# Altium PCB platforma.PcbDoc
Units mm, origin at the board's own origin, x right, y up, seen from the top; angles counter-clockwise.
Board outline 159.92 x 140 mm, 2 copper layers (Top Layer, Bottom Layer); 132 components, 295 nets, 836 pads, 33 vias.
Unrouted connection lines stored in the file: 480.
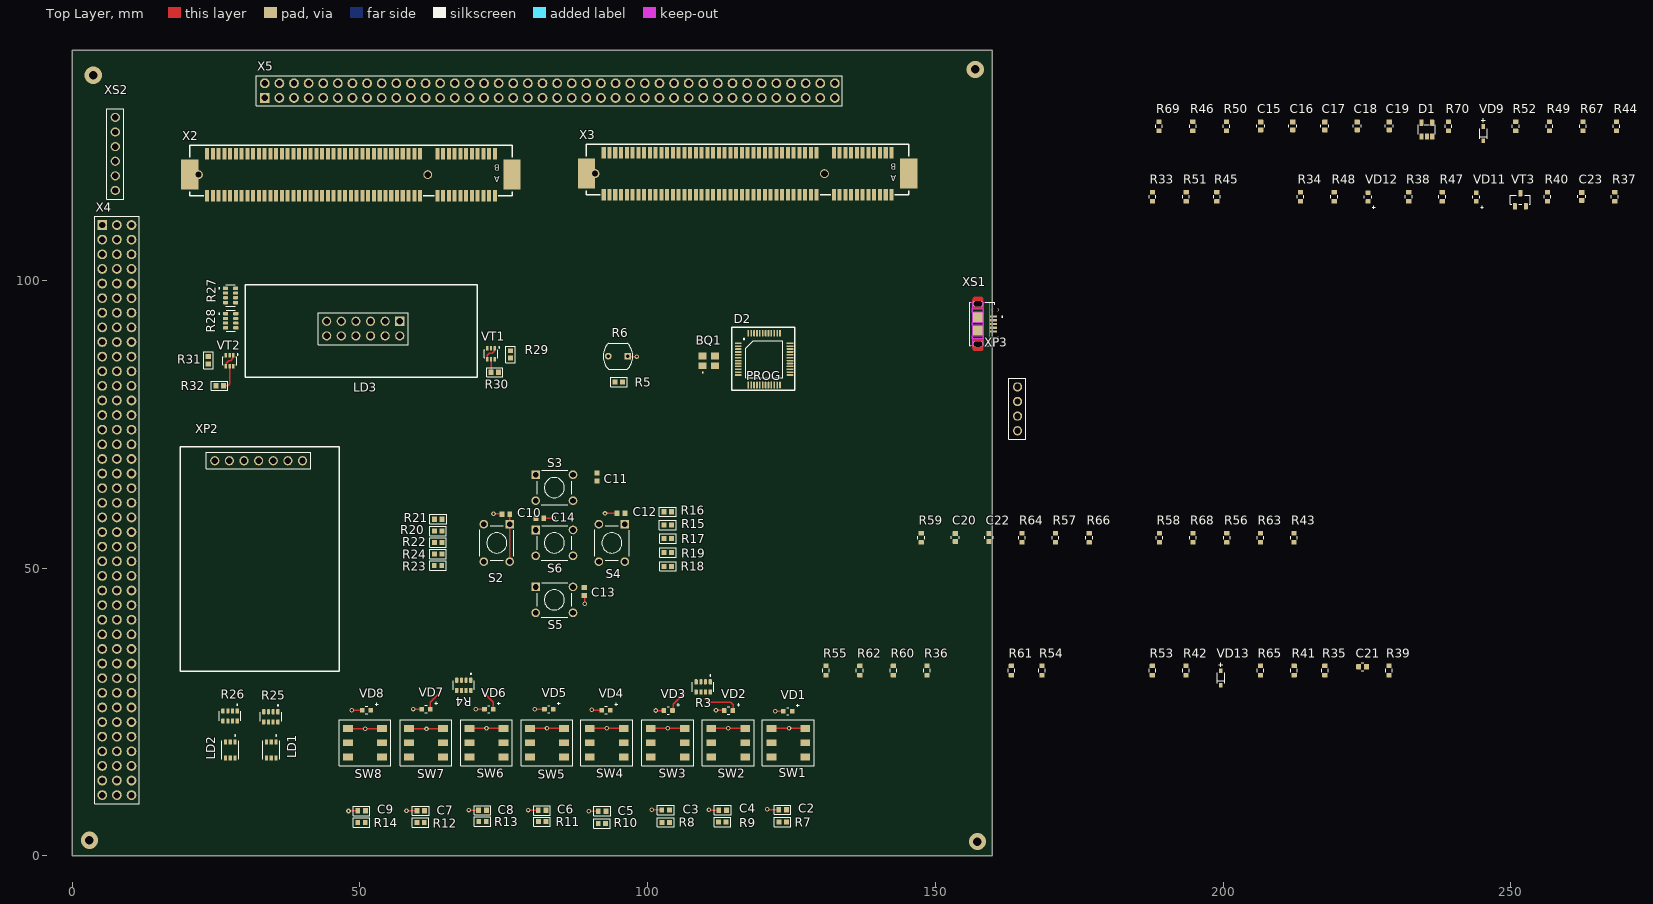
[diagram p0: Top Layer view]
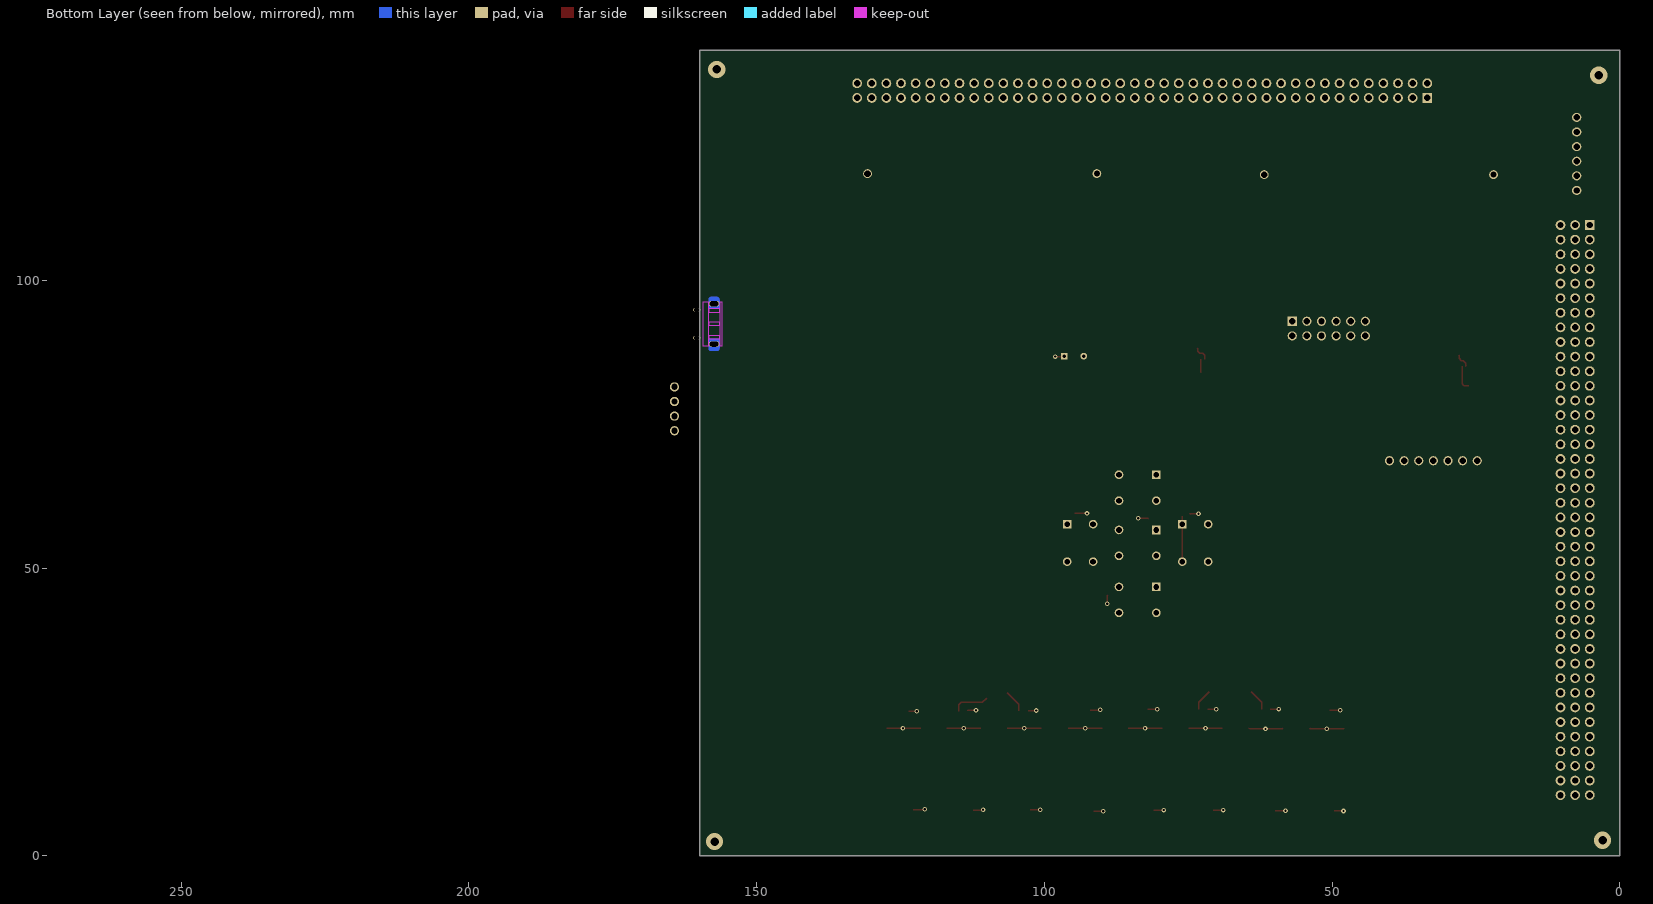
[diagram p1: Bottom Layer view, seen from below]

## Layer stack, top to bottom
Top Solder: solder mask 0.0102, Solder Resist, Dk 3.5
Top Layer: signal copper 0.0356
Dielectric 1: dielectric 0.32, FR-4, Dk 4.8
Bottom Layer: signal copper 0.0356
Bottom Solder: solder mask 0.0102, Solder Resist, Dk 3.5

## Board outline
0,0 159.925,0 159.925,140 0,140

## Design rules (kind name [scope] priority, off if disabled: settings)
Clearance [All] p1: gap=0.254 ignorepadtopadclearanceinfootprint=FALSE except(0: Arc-Hole Track-Hole SMDPad-Hole THPad-Hole Via-Hole Fill-Hole Poly-Hole Region-Hole Text-Hole)
PolygonConnect [All] p1: connectstyle=Relief reliefconductorwidth=0.254 reliefentries=4 polygonreliefangle="90 Angle" airgapwidth=0.254
RoutingVias [All] p1: holewidth=0.9 width=1.5 viastyle="Through Hole" minholewidth=0.4 minwidth=0.8 maxholewidth=0.7 maxwidth=1.27
SolderMaskExpansion [All] p1: expansion=0.102 istentingtop=FALSE
Width [All] p1: maxlimit=0.5 minlimit=0.2 preferedwidth=0.254 minimp=50.000000 maximp=50.000000 favimp=50.000000
30 further rules are at their usual default settings.

## Classes and differential pairs
component class GPIO_mcu_plis: X4 X5
component class служебный: C1 L1 R1 R2 S1 XP1
component class программатор_мк: BQ1 BQ3 C15 C16 C17 C18 C19 C20 C21 C22 C23 D1 D2 JP1 JP2 R33 R34 R35 R36 R37 R38 R39 R40 R41 R42 R43 R44 R45 R46 R47 R48 R49 R50 R51 R52 R53 R54 R55 R56 R57 R58 R59 R60 R61 R62 R63 R64 R65 R66 R67 R68 R69 R70 VD9 VD11 VD12 VD13 VT3 XP3 XS1 XS2
component class периферия: C2 C3 C4 C5 C6 C7 C8 C9 C10 C11 C12 C13 C14 LD1 LD2 LD3 R3 R4 R5 R6 R7 R8 R9 R10 R11 R12 R13 R14 R15 R16 R17 R18 R19 R20 R21 R22 R23 R24 R25 R26 R27 R28 R29 R30 R31 R32 S2 S3 S4 S5 S6 SW0 SW1 SW2 SW3 SW4 SW5 SW6 SW7 SW8 VD1 VD2 VD3 VD4 VD5 VD6 VD7 VD8 VT1 VT2 XP2
component class мезанин: X2 X3

## Components (designator, comment, footprint, x,y, rotation, side; value= is the part's Value field where it differs from the comment)
BQ1 "кварцевый резонатор_1" SMD3225_4P20MHZ20PF10PPM 110.625,86 r0 top value="8 МГц"
C2 "0.1 мкФ ±* * * *, *" C0603 123.456,8.028 r0 top value="0.1 мк"
C3 "0.1 мкФ ±* * * *, *" C0603 103.124,7.965 r0 top value="0.1 мк"
C4 "0.1 мкФ ±* * * *, *" C0603 113.042,7.952 r0 top value="0.1 мк"
C5 "0.1 мкФ ±* * * *, *" C0603 92.103,7.77 r0 top value="0.1 мк"
C6 "0.1 мкФ ±* * * *, *" C0603 81.674,7.922 r0 top value="0.1 мк"
C7 "0.1 мкФ ±* * * *, *" C0603 60.567,7.82 r0 top value="0.1 мк"
C8 "0.1 мкФ ±* * * *, *" C0603 71.311,7.947 r0 top value="0.1 мк"
C9 "0.1 мкФ ±* * * *, *" C0603 50.305,7.795 r0 top value="0.1 мк"
C10 "0.1 мкФ ±* * * *, *" C0603 75.375,59.375 r0 top value="0.1 мк"
C11 "0.1 мкФ ±* * * *, *" C0603 91.2,65.825 r90 top value="0.1 мк"
C12 "0.1 мкФ ±* * * *, *" C0603 95.377,59.536 r0 top value="0.1 мк"
C13 "0.1 мкФ ±* * * *, *" C0603 89.027,45.921 r90 top value="0.1 мк"
C14 "0.1 мкФ ±* * * *, *" C0603 81.28,58.647 r180 top value="0.1 мк"
C15 "1 мкФ ±* * * *, *" K10-79_1.6_0.8(0603) 206.511,126.83 r90 top value="1 мк"
C16 "0.1 мкФ ±* * * *, *" K10-79_1.6_0.8(0603) 212.112,126.83 r90 top value="0.1 мк"
C17 "0.01 мкФ ±* * * *, *" K10-79_1.6_0.8(0603) 217.687,126.83 r90 top value="0.01 мк"
C18 "0.1 мкФ ±* * * *, *" K10-79_1.6_0.8(0603) 223.287,126.83 r90 top value="0.1 мк"
C19 "1 мкФ ±* * * *, *" K10-79_1.6_0.8(0603) 228.862,126.83 r90 top value="1 мк"
C20 "20Ф ±* * * *, *" K10-79_1.6_0.8(0603) 153.49,55.305 r90 top value=20
C21 "0.1 мкФ ±* * * *, *" K10-79_1.6_0.8(0603) 224.223,32.855 r0 top value="0.1 мк"
C22 "20Ф ±* * * *, *" K10-79_1.6_0.8(0603) 159.316,55.305 r90 top value=20
C23 "20Ф ±* * * *, *" K10-79_1.6_0.8(0603) 262.335,114.58 r90 top value=20
D1 "LT1761ES5-2.5 (TSOT-23) Linear Technology" SOT-23-5 235.388,126.205 r0 top value=LD3985M33R
D2 "(LQFP-48) Xilinx" LQFP48 120.25,86.3 r0 top value=STM32F103C8T6
LD1 "RGB" LED_150352M173300 34.6,18.4 r270 top
LD2 "RGB" LED_150352M173300 27.475,18.4 r270 top
LD3 "4042AS (TSOT-23) Linear Technology" PLD-12 48.04,91.62 r90 top value="7-сегментный индикатор"
R3 "330" RESCAXE80P320X160X70-8N 109.65,29.35 r270 top
R4 "330" RESCAXE80P320X160X70-8N 68.05,29.625 r270 top
R5 "100 кОм ±* *, *" P1-12-0.1(0603) 95.012,82.307 r0 top value="100 к"
R6 "*Ом ±* *, *" PHODET_PDV-P8103 94.845,86.825 r180 top
R7 "10 кОм ±* *, *" P1-12-0.1(0603) 123.456,5.895 r0 top value="10 к"
R8 "10 кОм ±* *, *" P1-12-0.1(0603) 103.137,5.814 r0 top value="10 к"
R9 "10 кОм ±* *, *" P1-12-0.1(0603) 112.992,5.869 r0 top value="10 к"
R10 "10 кОм ±* *, *" P1-12-0.1(0603) 92.063,5.636 r0 top value="10 к"
R11 "10 кОм ±* *, *" P1-12-0.1(0603) 81.674,5.941 r0 top value="10 к"
R12 "10 кОм ±* *, *" P1-12-0.1(0603) 60.541,5.788 r0 top value="10 к"
R13 "10 кОм ±* *, *" P1-12-0.1(0603) 71.301,5.966 r0 top value="10 к"
R14 "10 кОм ±* *, *" P1-12-0.1(0603) 50.28,5.814 r0 top value="10 к"
R15 "10 кОм ±* *, *" P1-12-0.1(0603) 103.5,57.475 r0 top value="10 к"
R16 "10 кОм ±* *, *" P1-12-0.1(0603) 103.5,59.775 r0 top value="10 к"
R17 "10 кОм ±* *, *" P1-12-0.1(0603) 103.505,55.116 r0 top value="10 к"
R18 "10 кОм ±* *, *" P1-12-0.1(0603) 103.525,50.3 r0 top value="10 к"
R19 "10 кОм ±* *, *" P1-12-0.1(0603) 103.525,52.725 r0 top value="10 к"
R20 "1 кОм ±* *, *" P1-12-0.1(0603) 63.6,56.425 r180 top value="1 к"
R21 "1 кОм ±* *, *" P1-12-0.1(0603) 63.625,58.5 r180 top value="1 к"
R22 "1 кОм ±* *, *" P1-12-0.1(0603) 63.588,54.439 r180 top value="1 к"
R23 "1 кОм ±* *, *" P1-12-0.1(0603) 63.575,50.45 r180 top value="1 к"
R24 "1 кОм ±* *, *" P1-12-0.1(0603) 63.6,52.45 r180 top value="1 к"
R25 "330" RESCAXE80P320X160X70-8N 34.525,24.15 r270 top
R26 "330" RESCAXE80P320X160X70-8N 27.45,24.3 r270 top
R27 "330" RESCAXE80P320X160X70-8N 27.525,97.375 r0 top
R28 "330" RESCAXE80P320X160X70-8N 27.55,92.975 r0 top
R29 "2.2 кОм ±* *, *" P1-12-0.1(0603) 76.159,87.123 r270 top value="2.2 к"
R30 "2.2 кОм ±* *, *" P1-12-0.1(0603) 73.424,84.039 r0 top value="2.2 к"
R31 "2.2 кОм ±* *, *" P1-12-0.1(0603) 23.665,86.115 r270 top value="2.2 к"
R32 "2.2 кОм ±* *, *" P1-12-0.1(0603) 25.64,81.69 r180 top value="2.2 к"
R33 "100 кОм ±* *, *" "RES 0603" 187.731,114.53 r90 top value="100 к"
R34 "1,5 кОм ±* *, *" "RES 0603" 213.457,114.53 r90 top value="1,5 к"
R35 "100 кОм ±* *, *" "RES 0603" 217.673,32.205 r90 top value="100 к"
R36 "10 кОм ±* *, *" "RES 0603" 148.544,32.205 r90 top value="10 к"
R37 "10 кОм ±* *, *" "RES 0603" 268.06,114.53 r90 top value="10 к"
R38 "36 кОм ±* *, *" "RES 0603" 232.258,114.53 r90 top value="36 к"
R39 "100 кОм ±* *, *" "RES 0603" 228.848,32.205 r90 top value="100 к"
R40 "100Ом ±* *, *" "RES 0603" 256.385,114.53 r90 top value=100
R41 "10 кОм ±* *, *" "RES 0603" 212.348,32.205 r90 top value="10 к"
R42 "2.7 кОм ±* *, *" "RES 0603" 193.547,32.205 r90 top value="2.7 к"
R43 "4.7 кОм ±* *, *" "RES 0603" 212.318,55.255 r90 top value="4.7 к"
R44 "10 кОм ±* *, *" "RES 0603" 268.364,126.78 r90 top value="10 к"
R45 "0Ом ±* *, *" "RES 0603" 198.907,114.53 r90 top value=0
R46 "0Ом ±* *, *" "RES 0603" 194.736,126.78 r90 top value=0
R47 "1 кОм ±* *, *" "RES 0603" 238.084,114.53 r90 top value="1 к"
R48 "1 кОм ±* *, *" "RES 0603" 219.308,114.53 r90 top value="1 к"
R49 "4.7 кОм ±* *, *" "RES 0603" 256.689,126.78 r90 top value="4.7 к"
R50 "100Ом ±* *, *" "RES 0603" 200.561,126.78 r90 top value=100
R51 "0Ом ±* *, *" "RES 0603" 193.581,114.53 r90 top value=0
R52 "4.7 кОм ±* *, *" "RES 0603" 250.838,126.78 r90 top value="4.7 к"
R53 "100Ом ±* *, *" "RES 0603" 187.696,32.205 r90 top value=100
R54 "10 кОм ±* *, *" "RES 0603" 168.545,32.205 r90 top value="10 к"
R55 "22Ом ±* *, *" "RES 0603" 131.019,32.205 r90 top value=22
R56 "22Ом ±* *, *" "RES 0603" 200.643,55.255 r90 top value=22
R57 "22Ом ±* *, *" "RES 0603" 170.891,55.255 r90 top value=22
R58 "22Ом ±* *, *" "RES 0603" 188.967,55.255 r90 top value=22
R59 "0Ом ±* *, *" "RES 0603" 147.54,55.255 r90 top value=0
R60 "0Ом ±* *, *" "RES 0603" 142.694,32.205 r90 top value=0
R61 "0Ом ±* *, *" "RES 0603" 163.195,32.205 r90 top value=0
R62 "0Ом ±* *, *" "RES 0603" 136.869,32.205 r90 top value=0
R63 "0Ом ±* *, *" "RES 0603" 206.493,55.255 r90 top value=0
R64 "0Ом ±* *, *" "RES 0603" 165.066,55.255 r90 top value=0
R65 "0Ом ±* *, *" "RES 0603" 206.497,32.205 r90 top value=0
R66 "0Ом ±* *, *" "RES 0603" 176.742,55.255 r90 top value=0
R67 "0Ом ±* *, *" "RES 0603" 262.539,126.78 r90 top value=0
R68 "0Ом ±* *, *" "RES 0603" 194.792,55.255 r90 top value=0
R69 "100Ом ±* *, *" "RES 0603" 188.885,126.78 r90 top value=100
R70 "10 кОм ±* *, *" "RES 0603" 239.163,126.78 r90 top value="10 к"
S2 "Тактильный переключатель KLS7-TS6604-4.3-180-B KLS" SW_1825910-6-4 73.784,54.375 r270 top
S3 "Тактильный переключатель KLS7-TS6604-4.3-180-B KLS" SW_1825910-6-4 83.784,63.975 r0 top
S4 "Тактильный переключатель KLS7-TS6604-4.3-180-B KLS" SW_1825910-6-4 93.784,54.375 r270 top
S5 "Тактильный переключатель KLS7-TS6604-4.3-180-B KLS" SW_1825910-6-4 83.784,44.475 r0 top
S6 "Тактильный переключатель KLS7-TS6604-4.3-180-B KLS" SW_1825910-6-4 83.784,54.375 r0 top
SW1 "SW_two" "MSS-22D18 MSS22D18G2" 124.45,19.65 r180 top
SW2 "SW_two" "MSS-22D18 MSS22D18G2" 114,19.65 r180 top
SW3 "SW_two" "MSS-22D18 MSS22D18G2" 103.5,19.65 r180 top
SW4 "SW_two" "MSS-22D18 MSS22D18G2" 92.9,19.65 r180 top
SW5 "SW_two" "MSS-22D18 MSS22D18G2" 82.5,19.65 r180 top
SW6 "SW_two" "MSS-22D18 MSS22D18G2" 72,19.65 r180 top
SW7 "SW_two" "MSS-22D18 MSS22D18G2" 61.5,19.65 r180 top
SW8 "SW_two" "MSS-22D18 MSS22D18G2" 50.9,19.65 r180 top
VD1 "Светодиод" "LED 0603" 124.35,25.125 r180 top
VD2 "Светодиод" "LED 0603" 114.05,25.25 r180 top
VD3 "Светодиод" "LED 0603" 103.575,25.25 r180 top
VD4 "Светодиод" "LED 0603" 92.775,25.325 r180 top
VD5 "Светодиод" "LED 0603" 82.825,25.475 r180 top
VD6 "Светодиод" "LED 0603" 72.4,25.475 r180 top
VD7 "Светодиод" "LED 0603" 61.5,25.5 r180 top
VD8 "Светодиод" "LED 0603" 51.15,25.325 r180 top
VD9 "BAS316" SOD-323 245.213,125.48 r90 top
VD11 "Светодиод" "LED 0603" 243.984,114.48 r90 top
VD12 "Светодиод" "LED 0603" 225.183,114.48 r90 top
VD13 "BAS316" SOD-323 199.597,30.905 r90 top
VT1 "2Т3129А9 (КТ-46А) АО.336.448ТУ / 02" SOT-363 72.79,87.24 r180 top value=2Т3129А9
VT2 "2Т3129А9 (КТ-46А) АО.336.448ТУ / 02" SOT-363 27.365,86.015 r180 top value=2Т3129А9
VT3 "BC847C (SOT-23) NXP" SOT23(KT-46) 251.659,114.005 r0 top value=9013
X2 "KONT_POLE_MEZ" 3113-112T 61.8,118.375 r180 top
X3 "KONT_POLE_MEZ" 3113-112T 130.725,118.55 r180 top
X4 "KONT_POLE_MEZ" PLT-120 7.98,66.141 r0 top
X5 "KONT_POLE_MEZ" PLD-80 42.36,132.97 r90 top
XP2 "KONT_POLE_8" PBS-7 32.405,68.648 r270 top
XP3 "KONT_POLE_4" PLS-4 164.275,77.675 r0 top
XS1 "KONT_POLE_USB_DBG" MICRO_USB 157.5,92.35 r270 top
XS2 "KONT_POLE_USB_DBG" PBS-6 7.5,115.62 r90 top

## Footprints (in the part's own frame and the unit in brackets; to place one, negate y for a bottom-side part, rotate by r counter-clockwise, add the part's x,y. Pads: shape width x height; smd on the part's side, far side on the other; paste and mask are expansions set on the pad)
3113-112T [mm]
  round 1.524 hole 1.07: 4(39.85,0)
  round 1.524 hole 1.15: 5(0,0)
  rect 3x5.2 smd paste-0.025 mask+0.05: 50(-14.65,0) 51(41.35,0)
  rect 0.7x2 smd paste-0.025 mask+0.05: A1(-11.65,3.7) A2(-10.65,3.7) A3(-9.65,3.7) A4(-8.65,3.7) A5(-7.65,3.7) A6(-6.65,3.7) A7(-5.65,3.7) A8(-4.65,3.7) A9(-3.65,3.7) A10(-2.65,3.7) A11(-1.65,3.7) A12(1.35,3.7) A13(2.35,3.7) A14(3.35,3.7) A15(4.35,3.7) A16(5.35,3.7) A17(6.35,3.7) A18(7.35,3.7) A19(8.35,3.7) A20(9.35,3.7) A21(10.35,3.7) A22(11.35,3.7) A23(12.35,3.7) A24(13.35,3.7) A25(14.35,3.7) A26(15.35,3.7) A27(16.35,3.7) A28(17.35,3.7) A29(18.35,3.7) A30(19.35,3.7) A31(20.35,3.7) A32(21.35,3.7) A33(22.35,3.7) A34(23.35,3.7) A35(24.35,3.7) A36(25.35,3.7) A37(26.35,3.7) A38(27.35,3.7) A39(28.35,3.7) A40(29.35,3.7) A41(30.35,3.7) A42(31.35,3.7) A43(32.35,3.7) A44(33.35,3.7) A45(34.35,3.7) A46(35.35,3.7) A47(36.35,3.7) A48(37.35,3.7) A49(38.35,3.7) B1(-11.65,-3.6) B2(-10.65,-3.6) B3(-9.65,-3.6) B4(-8.65,-3.6) B5(-7.65,-3.6) B6(-6.65,-3.6) B7(-5.65,-3.6) B8(-4.65,-3.6) B9(-3.65,-3.6) B10(-2.65,-3.6) B11(-1.65,-3.6) B12(1.35,-3.6) B13(2.35,-3.6) B14(3.35,-3.6) B15(4.35,-3.6) B16(5.35,-3.6) B17(6.35,-3.6) B18(7.35,-3.6) B19(8.35,-3.6) B20(9.35,-3.6) B21(10.35,-3.6) B22(11.35,-3.6) B23(12.35,-3.6) B24(13.35,-3.6) B25(14.35,-3.6) B26(15.35,-3.6) B27(16.35,-3.6) B28(17.35,-3.6) B29(18.35,-3.6) B30(19.35,-3.6) B31(20.35,-3.6) B32(21.35,-3.6) B33(22.35,-3.6) B34(23.35,-3.6) B35(24.35,-3.6) B36(25.35,-3.6) B37(26.35,-3.6) B38(27.35,-3.6) B39(28.35,-3.6) B40(29.35,-3.6) B41(30.35,-3.6) B42(31.35,-3.6) B43(32.35,-3.6) B44(33.35,-3.6) B45(34.35,-3.6) B46(35.35,-3.6) B47(36.35,-3.6) B48(37.35,-3.6) B49(38.35,-3.6)
  silkscreen extent -14.65,-5.1 41.35,3.7
C0603 [mm]
  rect 0.85x0.95 smd: 1(-0.675,0) 2(0.675,0)
  body extent -0.8,-0.4 0.8,0.4, height 0.9
K10-79_1.6_0.8(0603) [mm]
  rrect20% 0.85x0.95 smd mask+0.1: 1(-0.675,0) 2(0.675,0)
  silkscreen extent -0.2,-0.7 0.2,0.7, body extent -0.8,-0.42 0.84,0.43, height 0.41
"LED 0603" [mm]
  rrect20% 0.8x0.8 smd mask+0.1: 1(-0.75,0) 2(0.75,0)
  silkscreen extent -2,-1.25 0.2,0.63, body extent -0.8,-0.4 0.8,0.4, height 0.6
LED_150352M173300 [mm]
  rect 0.89x0.55 smd: 1(-1.395,0.85) 2(1.395,0.85) 3(-1.395,0) 4(1.395,0) 5(-1.395,-0.85) 6(1.395,-0.85)
  silkscreen extent -2.6,-1.44 1.6,1.44, body extent -1.6,-1.38 1.6,1.38, height 0.25
LQFP48 [mm]
  rect 1.2x0.3 smd paste-0.025 mask+0.05: 1(-4.5,2.75)
  oval 1.2x0.3 smd paste-0.025 mask+0.05: 2(-4.5,2.25) 3(-4.5,1.75) 4(-4.5,1.25) 5(-4.5,0.75) 6(-4.5,0.25) 7(-4.5,-0.25) 8(-4.5,-0.75) 9(-4.5,-1.25) 10(-4.5,-1.75) 11(-4.5,-2.25) 12(-4.5,-2.75) 25(4.5,-2.75) 26(4.5,-2.25) 27(4.5,-1.75) 28(4.5,-1.25) 29(4.5,-0.75) 30(4.5,-0.25) 31(4.5,0.25) 32(4.5,0.75) 33(4.5,1.25) 34(4.5,1.75) 35(4.5,2.25) 36(4.5,2.75)
  oval 0.3x1.2 smd paste-0.025 mask+0.05: 13(-2.75,-4.5) 14(-2.25,-4.5) 15(-1.75,-4.5) 16(-1.25,-4.5) 17(-0.75,-4.5) 18(-0.25,-4.5) 19(0.25,-4.5) 20(0.75,-4.5) 21(1.25,-4.5) 22(1.75,-4.5) 23(2.25,-4.5) 24(2.75,-4.5) 37(2.75,4.5) 38(2.25,4.5) 39(1.75,4.5) 40(1.25,4.5) 41(0.75,4.5) 42(0.25,4.5) 43(-0.25,4.5) 44(-0.75,4.5) 45(-1.25,4.5) 46(-1.75,4.5) 47(-2.25,4.5) 48(-2.75,4.5)
  silkscreen extent -3.6,-3.21 3.21,3.6, body extent -3.2,-3.15 3.2,3.25, height 1.6
MICRO_USB [mm]
  rect 0.4x1.35 smd mask+0.1: 1(-1.375,2.575) 2(-0.725,2.575) 3(-0.075,2.575) 4(0.575,2.575) 5(1.225,2.575)
  oval 0.525x1.25 hole 0.65 slot 0.85 at 90 deg mask+0.1: S1(-2.5,2.9) S2(2.35,2.9)
  oval 0.95x1.9 hole 0.825 slot 1.5 at 90 deg mask+0.1: S3(-3.587,-0.1) S6(3.438,-0.1)
  rect 1.8x1.9 smd mask+0.1: S4(-1.225,-0.1) S5(1.075,-0.1)
  Top Layer region: 4.151,0.849 4.177,0.847 4.203,0.844 4.229,0.839 4.254,0.833 4.28,0.826 4.304,0.817 4.328,0.807 4.352,0.796 4.375,0.783 4.397,0.769 4.419,0.755 4.44,0.739 4.46,0.722 4.479,0.704 4.497,0.685 4.514,0.665 4.53,0.644 4.544,0.622 4.558,0.6 4.571,0.577 4.582,0.553 4.592,0.529 4.601,0.505 4.608,0.479 4.614,0.454 4.619,0.428 4.622,0.402 4.624,0.376 4.625,0.35 4.625,-0.1 3.85,-0.1 3.85,0.375 3.85,0.389 3.848,0.404 3.847,0.418 3.844,0.432 3.841,0.446 3.837,0.46 3.832,0.474 3.826,0.487 3.82,0.5 3.813,0.513 3.806,0.525 3.797,0.537 3.789,0.548 3.779,0.559 3.769,0.569 3.759,0.579 3.748,0.589 3.737,0.597 3.725,0.606 3.712,0.613 3.7,0.62 3.687,0.626 3.674,0.632 3.66,0.637 3.646,0.641 3.632,0.644 3.618,0.647 3.604,0.648 3.589,0.65 3.309,0.65 3.294,0.648 3.278,0.646 3.263,0.643 3.247,0.64 3.232,0.635 3.217,0.63 3.203,0.624 3.189,0.617 3.175,0.61 3.162,0.602 3.149,0.593 3.136,0.583 3.124,0.573 3.113,0.562 3.102,0.551 3.092,0.539 3.082,0.526 3.073,0.513 3.065,0.5 3.058,0.486 3.051,0.472 3.045,0.458 3.04,0.443 3.035,0.428 3.032,0.412 3.029,0.397 3.027,0.381 3.025,0.366 3.025,0.35 3.025,-0.1 2.525,-0.1 2.525,0.85 4.125,0.85
  Top Layer region: -2.675,-1.05 -4.275,-1.05 -4.301,-1.049 -4.327,-1.047 -4.353,-1.044 -4.379,-1.039 -4.404,-1.033 -4.43,-1.026 -4.454,-1.017 -4.478,-1.007 -4.502,-0.996 -4.525,-0.983 -4.547,-0.969 -4.569,-0.955 -4.59,-0.939 -4.61,-0.922 -4.629,-0.904 -4.647,-0.885 -4.664,-0.865 -4.68,-0.844 -4.694,-0.822 -4.708,-0.8 -4.721,-0.777 -4.732,-0.753 -4.742,-0.729 -4.751,-0.705 -4.758,-0.679 -4.764,-0.654 -4.769,-0.628 -4.772,-0.602 -4.774,-0.576 -4.775,-0.55 -4.775,-0.1 -4,-0.1 -4,-0.575 -4,-0.589 -3.998,-0.604 -3.997,-0.618 -3.994,-0.632 -3.991,-0.646 -3.987,-0.66 -3.982,-0.674 -3.976,-0.687 -3.97,-0.7 -3.963,-0.713 -3.956,-0.725 -3.947,-0.737 -3.939,-0.748 -3.929,-0.759 -3.919,-0.769 -3.909,-0.779 -3.898,-0.789 -3.887,-0.797 -3.875,-0.806 -3.862,-0.813 -3.85,-0.82 -3.837,-0.826 -3.824,-0.832 -3.81,-0.837 -3.796,-0.841 -3.782,-0.844 -3.768,-0.847 -3.754,-0.848 -3.739,-0.85 -3.459,-0.85 -3.444,-0.848 -3.428,-0.846 -3.413,-0.843 -3.397,-0.84 -3.382,-0.835 -3.367,-0.83 -3.353,-0.824 -3.339,-0.817 -3.325,-0.81 -3.312,-0.802 -3.299,-0.793 -3.286,-0.783 -3.274,-0.773 -3.263,-0.762 -3.252,-0.751 -3.242,-0.739 -3.232,-0.726 -3.223,-0.713 -3.215,-0.7 -3.208,-0.686 -3.201,-0.672 -3.195,-0.658 -3.19,-0.643 -3.185,-0.628 -3.182,-0.612 -3.179,-0.597 -3.177,-0.581 -3.175,-0.566 -3.175,-0.55 -3.175,-0.1 -2.675,-0.1
  Top Layer region: 4.625,-0.55 4.624,-0.576 4.622,-0.602 4.619,-0.628 4.614,-0.654 4.608,-0.679 4.601,-0.705 4.592,-0.729 4.582,-0.753 4.571,-0.777 4.558,-0.8 4.544,-0.822 4.53,-0.844 4.514,-0.865 4.497,-0.885 4.479,-0.904 4.46,-0.922 4.44,-0.939 4.419,-0.955 4.397,-0.969 4.375,-0.983 4.352,-0.996 4.328,-1.007 4.304,-1.017 4.28,-1.026 4.254,-1.033 4.229,-1.039 4.203,-1.044 4.177,-1.047 4.151,-1.049 4.125,-1.05 2.525,-1.05 2.525,-0.1 3.025,-0.1 3.025,-0.55 3.025,-0.566 3.027,-0.581 3.029,-0.597 3.032,-0.612 3.035,-0.628 3.04,-0.643 3.045,-0.658 3.051,-0.672 3.058,-0.686 3.065,-0.7 3.073,-0.713 3.082,-0.726 3.092,-0.739 3.102,-0.751 3.113,-0.762 3.124,-0.773 3.136,-0.783 3.149,-0.793 3.162,-0.802 3.175,-0.81 3.189,-0.817 3.203,-0.824 3.217,-0.83 3.232,-0.835 3.247,-0.84 3.263,-0.843 3.278,-0.846 3.294,-0.848 3.309,-0.85 3.566,-0.85 3.581,-0.848 3.597,-0.846 3.612,-0.843 3.628,-0.84 3.643,-0.835 3.658,-0.83 3.672,-0.824 3.686,-0.817 3.7,-0.81 3.713,-0.802 3.726,-0.793 3.739,-0.783 3.751,-0.773 3.762,-0.762 3.773,-0.751 3.783,-0.739 3.793,-0.726 3.802,-0.713 3.81,-0.7 3.817,-0.686 3.824,-0.672 3.83,-0.658 3.835,-0.643 3.84,-0.628 3.843,-0.612 3.846,-0.597 3.848,-0.581 3.85,-0.566 3.85,-0.55 3.85,-0.1 4.625,-0.1
  Top Layer region: -2.675,-0.1 -3.175,-0.1 -3.175,0.35 -3.175,0.366 -3.177,0.381 -3.179,0.397 -3.182,0.412 -3.185,0.428 -3.19,0.443 -3.195,0.458 -3.201,0.472 -3.208,0.486 -3.215,0.5 -3.223,0.513 -3.232,0.526 -3.242,0.539 -3.252,0.551 -3.263,0.562 -3.274,0.573 -3.286,0.583 -3.299,0.593 -3.312,0.602 -3.325,0.61 -3.339,0.617 -3.353,0.624 -3.367,0.63 -3.382,0.635 -3.397,0.64 -3.413,0.643 -3.428,0.646 -3.444,0.648 -3.459,0.65 -3.716,0.65 -3.731,0.648 -3.747,0.646 -3.762,0.643 -3.778,0.64 -3.793,0.635 -3.808,0.63 -3.822,0.624 -3.836,0.617 -3.85,0.61 -3.863,0.602 -3.876,0.593 -3.889,0.583 -3.901,0.573 -3.912,0.562 -3.923,0.551 -3.933,0.539 -3.943,0.526 -3.952,0.513 -3.96,0.5 -3.967,0.486 -3.974,0.472 -3.98,0.458 -3.985,0.443 -3.99,0.428 -3.993,0.412 -3.996,0.397 -3.998,0.381 -4,0.366 -4,0.35 -4,-0.1 -4.775,-0.1 -4.775,0.35 -4.774,0.376 -4.772,0.402 -4.769,0.428 -4.764,0.454 -4.758,0.479 -4.751,0.505 -4.742,0.529 -4.732,0.553 -4.721,0.577 -4.708,0.6 -4.694,0.622 -4.68,0.644 -4.664,0.665 -4.647,0.685 -4.629,0.704 -4.61,0.722 -4.59,0.739 -4.569,0.755 -4.547,0.769 -4.525,0.783 -4.502,0.796 -4.478,0.807 -4.454,0.817 -4.43,0.826 -4.404,0.833 -4.379,0.839 -4.353,0.844 -4.327,0.847 -4.301,0.849 -4.275,0.85 -2.675,0.85
  Bottom Layer region: 4.151,0.849 4.177,0.847 4.203,0.844 4.229,0.839 4.254,0.833 4.28,0.826 4.304,0.817 4.328,0.807 4.352,0.796 4.375,0.783 4.397,0.769 4.419,0.755 4.44,0.739 4.46,0.722 4.479,0.704 4.497,0.685 4.514,0.665 4.53,0.644 4.544,0.622 4.558,0.6 4.571,0.577 4.582,0.553 4.592,0.529 4.601,0.505 4.608,0.479 4.614,0.454 4.619,0.428 4.622,0.402 4.624,0.376 4.625,0.35 4.625,-0.1 3.85,-0.1 3.85,0.375 3.85,0.389 3.848,0.404 3.847,0.418 3.844,0.432 3.841,0.446 3.837,0.46 3.832,0.474 3.826,0.487 3.82,0.5 3.813,0.513 3.806,0.525 3.797,0.537 3.789,0.548 3.779,0.559 3.769,0.569 3.759,0.579 3.748,0.589 3.737,0.597 3.725,0.606 3.712,0.613 3.7,0.62 3.687,0.626 3.674,0.632 3.66,0.637 3.646,0.641 3.632,0.644 3.618,0.647 3.604,0.648 3.589,0.65 3.309,0.65 3.294,0.648 3.278,0.646 3.263,0.643 3.247,0.64 3.232,0.635 3.217,0.63 3.203,0.624 3.189,0.617 3.175,0.61 3.162,0.602 3.149,0.593 3.136,0.583 3.124,0.573 3.113,0.562 3.102,0.551 3.092,0.539 3.082,0.526 3.073,0.513 3.065,0.5 3.058,0.486 3.051,0.472 3.045,0.458 3.04,0.443 3.035,0.428 3.032,0.412 3.029,0.397 3.027,0.381 3.025,0.366 3.025,0.35 3.025,-0.1 2.525,-0.1 2.525,0.85 4.125,0.85
  Bottom Layer region: -2.675,-1.05 -4.275,-1.05 -4.301,-1.049 -4.327,-1.047 -4.353,-1.044 -4.379,-1.039 -4.404,-1.033 -4.43,-1.026 -4.454,-1.017 -4.478,-1.007 -4.502,-0.996 -4.525,-0.983 -4.547,-0.969 -4.569,-0.955 -4.59,-0.939 -4.61,-0.922 -4.629,-0.904 -4.647,-0.885 -4.664,-0.865 -4.68,-0.844 -4.694,-0.822 -4.708,-0.8 -4.721,-0.777 -4.732,-0.753 -4.742,-0.729 -4.751,-0.705 -4.758,-0.679 -4.764,-0.654 -4.769,-0.628 -4.772,-0.602 -4.774,-0.576 -4.775,-0.55 -4.775,-0.1 -4,-0.1 -4,-0.575 -4,-0.589 -3.998,-0.604 -3.997,-0.618 -3.994,-0.632 -3.991,-0.646 -3.987,-0.66 -3.982,-0.674 -3.976,-0.687 -3.97,-0.7 -3.963,-0.713 -3.956,-0.725 -3.947,-0.737 -3.939,-0.748 -3.929,-0.759 -3.919,-0.769 -3.909,-0.779 -3.898,-0.789 -3.887,-0.797 -3.875,-0.806 -3.862,-0.813 -3.85,-0.82 -3.837,-0.826 -3.824,-0.832 -3.81,-0.837 -3.796,-0.841 -3.782,-0.844 -3.768,-0.847 -3.754,-0.848 -3.739,-0.85 -3.459,-0.85 -3.444,-0.848 -3.428,-0.846 -3.413,-0.843 -3.397,-0.84 -3.382,-0.835 -3.367,-0.83 -3.353,-0.824 -3.339,-0.817 -3.325,-0.81 -3.312,-0.802 -3.299,-0.793 -3.286,-0.783 -3.274,-0.773 -3.263,-0.762 -3.252,-0.751 -3.242,-0.739 -3.232,-0.726 -3.223,-0.713 -3.215,-0.7 -3.208,-0.686 -3.201,-0.672 -3.195,-0.658 -3.19,-0.643 -3.185,-0.628 -3.182,-0.612 -3.179,-0.597 -3.177,-0.581 -3.175,-0.566 -3.175,-0.55 -3.175,-0.1 -2.675,-0.1
  Bottom Layer region: 4.625,-0.55 4.624,-0.576 4.622,-0.602 4.619,-0.628 4.614,-0.654 4.608,-0.679 4.601,-0.705 4.592,-0.729 4.582,-0.753 4.571,-0.777 4.558,-0.8 4.544,-0.822 4.53,-0.844 4.514,-0.865 4.497,-0.885 4.479,-0.904 4.46,-0.922 4.44,-0.939 4.419,-0.955 4.397,-0.969 4.375,-0.983 4.352,-0.996 4.328,-1.007 4.304,-1.017 4.28,-1.026 4.254,-1.033 4.229,-1.039 4.203,-1.044 4.177,-1.047 4.151,-1.049 4.125,-1.05 2.525,-1.05 2.525,-0.1 3.025,-0.1 3.025,-0.55 3.025,-0.566 3.027,-0.581 3.029,-0.597 3.032,-0.612 3.035,-0.628 3.04,-0.643 3.045,-0.658 3.051,-0.672 3.058,-0.686 3.065,-0.7 3.073,-0.713 3.082,-0.726 3.092,-0.739 3.102,-0.751 3.113,-0.762 3.124,-0.773 3.136,-0.783 3.149,-0.793 3.162,-0.802 3.175,-0.81 3.189,-0.817 3.203,-0.824 3.217,-0.83 3.232,-0.835 3.247,-0.84 3.263,-0.843 3.278,-0.846 3.294,-0.848 3.309,-0.85 3.566,-0.85 3.581,-0.848 3.597,-0.846 3.612,-0.843 3.628,-0.84 3.643,-0.835 3.658,-0.83 3.672,-0.824 3.686,-0.817 3.7,-0.81 3.713,-0.802 3.726,-0.793 3.739,-0.783 3.751,-0.773 3.762,-0.762 3.773,-0.751 3.783,-0.739 3.793,-0.726 3.802,-0.713 3.81,-0.7 3.817,-0.686 3.824,-0.672 3.83,-0.658 3.835,-0.643 3.84,-0.628 3.843,-0.612 3.846,-0.597 3.848,-0.581 3.85,-0.566 3.85,-0.55 3.85,-0.1 4.625,-0.1
  Bottom Layer region: -2.675,-0.1 -3.175,-0.1 -3.175,0.35 -3.175,0.366 -3.177,0.381 -3.179,0.397 -3.182,0.412 -3.185,0.428 -3.19,0.443 -3.195,0.458 -3.201,0.472 -3.208,0.486 -3.215,0.5 -3.223,0.513 -3.232,0.526 -3.242,0.539 -3.252,0.551 -3.263,0.562 -3.274,0.573 -3.286,0.583 -3.299,0.593 -3.312,0.602 -3.325,0.61 -3.339,0.617 -3.353,0.624 -3.367,0.63 -3.382,0.635 -3.397,0.64 -3.413,0.643 -3.428,0.646 -3.444,0.648 -3.459,0.65 -3.716,0.65 -3.731,0.648 -3.747,0.646 -3.762,0.643 -3.778,0.64 -3.793,0.635 -3.808,0.63 -3.822,0.624 -3.836,0.617 -3.85,0.61 -3.863,0.602 -3.876,0.593 -3.889,0.583 -3.901,0.573 -3.912,0.562 -3.923,0.551 -3.933,0.539 -3.943,0.526 -3.952,0.513 -3.96,0.5 -3.967,0.486 -3.974,0.472 -3.98,0.458 -3.985,0.443 -3.99,0.428 -3.993,0.412 -3.996,0.397 -3.998,0.381 -4,0.366 -4,0.35 -4,-0.1 -4.775,-0.1 -4.775,0.35 -4.774,0.376 -4.772,0.402 -4.769,0.428 -4.764,0.454 -4.758,0.479 -4.751,0.505 -4.742,0.529 -4.732,0.553 -4.721,0.577 -4.708,0.6 -4.694,0.622 -4.68,0.644 -4.664,0.665 -4.647,0.685 -4.629,0.704 -4.61,0.722 -4.59,0.739 -4.569,0.755 -4.547,0.769 -4.525,0.783 -4.502,0.796 -4.478,0.807 -4.454,0.817 -4.43,0.826 -4.404,0.833 -4.379,0.839 -4.353,0.844 -4.327,0.847 -4.301,0.849 -4.275,0.85 -2.675,0.85
  Keep-Out Layer region: 3.675,-1.55 -3.825,-1.55 -3.825,-1.05 3.675,-1.05
  Keep-Out Layer region: 2.525,-1.05 1.975,-1.05 1.975,0.85 2.525,0.85
  Keep-Out Layer region: 0.175,-1.05 -0.325,-1.05 -0.325,0.85 0.175,0.85
  Keep-Out Layer region: -2.125,-1.05 -2.675,-1.05 -2.675,0.85 -2.125,0.85
  Keep-Out Layer region: 3.675,0.85 -3.825,0.85 -3.825,1.9 3.675,1.9
  Keep-Out Layer region: 2.525,-1.05 1.975,-1.05 1.975,0.85 2.525,0.85
  Keep-Out Layer region: 0.175,-1.05 -0.325,-1.05 -0.325,0.85 0.175,0.85
  Keep-Out Layer region: -2.125,-1.05 -2.675,-1.05 -2.675,0.85 -2.125,0.85
  silkscreen extent -3.83,-1.55 3.67,4.21, body extent -4.12,-2.98 3.97,2.82, height 1.48
"MSS-22D18 MSS22D18G2" [mm]
  rect 1.7x1.2 smd: 1(-2.95,2.5) 1(2.95,2.5) 2(-2.95,0) 2(2.95,0) 3(-2.95,-2.5) 3(2.95,-2.5)
  silkscreen extent -4.5,-4 4.5,4, body extent -2,-3.2 2,3.2, height 0.25
P1-12-0.1(0603) [mm]
  rect 0.85x0.9 smd: 1(-0.65,0) 2(0.65,0)
  body extent -0.8,-0.4 0.8,0.4, height 0.55
PBS-6 [mm] "DS1023-30-1x6"
  round 1.6 hole 1.1: 1(0,0) 2(2.54,0) 3(5.08,0) 4(7.62,0) 5(10.16,0) 6(12.7,0)
  silkscreen extent -1.5,-1.5 14.2,1.5, body extent -1.27,-1.27 13.97,1.27, height 8.4
PBS-7 [mm]
  round 1.6 hole 1.1: 1(0,-7.62) 2(0,-5.08) 3(0,-2.54) 4(0,0) 5(0,2.54) 6(0,5.08) 7(0,7.62)
  silkscreen extent -1.5,-9.07 1.4,9.07, body extent -1.3,-8.89 1.24,8.87, height 0.25
PHODET_PDV-P8103 [mm]
  rect 1.158x1.158 hole 0.65: 1(-1.7,0)
  round 1.158 hole 0.65: 2(1.7,0)
  silkscreen extent -2.58,-2.27 2.58,2.27
PLD-12 [mm]
  rect 1.6x1.6 hole 1.1: 1(1.27,-8.89)
  round 1.6 hole 1.1: 2(-1.27,-8.89) 3(1.27,-6.35) 4(-1.27,-6.35) 5(1.27,-3.81) 6(-1.27,-3.81) 7(1.27,-1.27) 8(-1.27,-1.27) 9(1.27,1.27) 10(-1.27,1.27) 11(1.27,3.81) 12(-1.27,3.81)
  silkscreen extent -2.77,-10.34 2.73,5.3, body extent -2.57,-10.16 2.52,5, height 0.25
PLD-80 [mm]
  rect 1.7x1.7 hole 1.1: 1(-1.27,8.89)
  round 1.7 hole 1.1: 2(1.27,8.89) 3(-1.27,6.35) 4(1.27,6.35) 5(-1.27,3.81) 6(1.27,3.81) 7(-1.27,1.27) 8(1.27,1.27) 9(-1.27,-1.27) 10(1.27,-1.27) 11(-1.27,-3.81) 12(1.27,-3.81) 13(-1.27,-6.35) 14(1.27,-6.35) 15(-1.27,-8.89) 16(1.27,-8.89) 17(-1.27,-11.43) 18(1.27,-11.43) 19(-1.27,-13.97) 20(1.27,-13.97) 21(-1.27,-16.51) 22(1.27,-16.51) 23(-1.27,-19.05) 24(1.27,-19.05) 25(-1.27,-21.59) 26(1.27,-21.59) 27(-1.27,-24.13) 28(1.27,-24.13) 29(-1.27,-26.67) 30(1.27,-26.67) 31(-1.27,-29.21) 32(1.27,-29.21) 33(-1.27,-31.75) 34(1.27,-31.75) 35(-1.27,-34.29) 36(1.27,-34.29) 37(-1.27,-36.83) 38(1.27,-36.83) 39(-1.27,-39.37) 40(1.27,-39.37) 41(-1.27,-41.91) 42(1.27,-41.91) 43(-1.27,-44.45) 44(1.27,-44.45) 45(-1.27,-46.99) 46(1.27,-46.99) 47(-1.27,-49.53) 48(1.27,-49.53) 49(-1.27,-52.07) 50(1.27,-52.07) 51(-1.27,-54.61) 52(1.27,-54.61) 53(-1.27,-57.15) 54(1.27,-57.15) 55(-1.27,-59.69) 56(1.27,-59.69) 57(-1.27,-62.23) 58(1.27,-62.23) 59(-1.27,-64.77) 60(1.27,-64.77) 61(-1.27,-67.31) 62(1.27,-67.31) 63(-1.27,-69.85) 64(1.27,-69.85) 65(-1.27,-72.39) 66(1.27,-72.39) 67(-1.27,-74.93) 68(1.27,-74.93) 69(-1.27,-77.47) 70(1.27,-77.47) 71(-1.27,-80.01) 72(1.27,-80.01) 73(-1.27,-82.55) 74(1.27,-82.55) 75(-1.27,-85.09) 76(1.27,-85.09) 77(-1.27,-87.63) 78(1.27,-87.63) 79(-1.27,-90.17) 80(1.27,-90.17)
  silkscreen extent -2.6,-91.47 2.6,10.38, body extent -2.5,-91.44 2.5,10.16, height 8.6
PLS-4 [mm]
  round 1.6 hole 1.1: 1(0,-3.81) 2(0,-1.27) 3(0,1.27) 4(0,3.81)
  silkscreen extent -1.5,-5.26 1.4,5.3, body extent -1.29,-5.06 1.25,5.1, height 8.54
PLT-120 [mm]
  rect 1.7x1.7 hole 1.1: 1(-2.745,43.464)
  round 1.7 hole 1.1: 2(-0.205,43.464) 3(2.335,43.464) 4(-2.745,40.924) 5(-0.205,40.924) 6(2.335,40.924) 7(-2.745,38.384) 8(-0.205,38.384) 9(2.335,38.384) 10(-2.745,35.844) 11(-0.205,35.844) 12(2.335,35.844) 13(-2.745,33.304) 14(-0.205,33.304) 15(2.335,33.304) 16(-2.745,30.764) 17(-0.205,30.764) 18(2.335,30.764) 19(-2.745,28.224) 20(-0.205,28.224) 21(2.335,28.224) 22(-2.745,25.684) 23(-0.205,25.684) 24(2.335,25.684) 25(-2.745,23.144) 26(-0.205,23.144) 27(2.335,23.144) 28(-2.745,20.604) 29(-0.205,20.604) 30(2.335,20.604) 31(-2.745,18.064) 32(-0.205,18.064) 34(-2.745,15.524) 35(-0.205,15.524) 36(2.335,15.524) 37(-2.745,12.984) 38(-0.205,12.984) 39(2.335,12.984) 40(-2.745,10.444) 41(-0.205,10.444) 42(2.335,10.444) 43(-2.745,7.904) 44(-0.205,7.904) 44(2.335,18.064) 45(2.335,7.904) 46(-2.745,5.364) 47(-0.205,5.364) 48(2.335,5.364) 49(-2.745,2.824) 50(-0.205,2.824) 51(2.335,2.824) 52(-2.745,0.284) 53(-0.205,0.284) 54(2.335,0.284) 55(-2.745,-2.256) 56(-0.205,-2.256) 57(2.335,-2.256) 58(-2.745,-4.796) 59(-0.205,-4.796) 60(2.335,-4.796) 61(-2.745,-7.336) 62(-0.205,-7.336) 63(2.335,-7.336) 64(-2.745,-9.876) 65(-0.205,-9.876) 66(2.335,-9.876) 67(-2.745,-12.416) 68(-0.205,-12.416) 69(2.335,-12.416) 70(-2.745,-14.956) 71(-0.205,-14.956) 72(2.335,-14.956) 73(-2.745,-17.496) 74(-0.205,-17.496) 75(2.335,-17.496) 76(-2.745,-20.036) 77(-0.205,-20.036) 78(2.335,-20.036) 79(-2.745,-22.576) 80(-0.205,-22.576) 81(2.335,-22.576) 82(-2.745,-25.116) 83(-0.205,-25.116) 84(2.335,-25.116) 85(-2.745,-27.656) 86(-0.205,-27.656) 87(2.335,-27.656) 88(-2.745,-30.196) 89(-0.205,-30.196) 90(2.335,-30.196) 91(-2.745,-32.736) 92(-0.205,-32.736) 93(2.335,-32.736) 94(-2.745,-35.276) 95(-0.205,-35.276) 96(2.335,-35.276) 97(-2.745,-37.816) 98(-0.205,-37.816) 99(2.335,-37.816) 100(-2.745,-40.356) 101(-0.205,-40.356) 102(2.335,-40.356) 103(-2.745,-42.896) 104(-0.205,-42.896) 105(2.335,-42.896) 106(-2.745,-45.436) 107(-0.205,-45.436) 108(2.335,-45.436) 109(-2.745,-47.976) 110(-0.205,-47.976) 111(2.335,-47.976) 112(-2.745,-50.516) 113(-0.205,-50.516) 114(2.335,-50.516) 115(-2.745,-53.056) 116(-0.205,-53.056) 117(2.335,-53.056) 118(-2.745,-55.596) 119(-0.205,-55.596) 120(2.335,-55.596)
  silkscreen extent -4.08,-57.06 3.71,44.95, body extent -4.02,-56.96 3.6,44.73, height 8.54
"RES 0603" [mm]
  rrect20% 0.8x0.9 smd paste-0.025 mask+0.05: 1(-0.8,0) 2(0.8,0)
  silkscreen extent -0.28,-0.58 0.27,0.57, body extent -0.85,-0.4 0.85,0.4, height 0.56
RESCAXE80P320X160X70-8N [mm]
  rrect50% 0.9x0.61 smd: 1(-0.885,1.24) 4(-0.885,-1.24) 5(0.885,-1.24) 8(0.885,1.24)
  rrect50% 0.9x0.53 smd: 2(-0.885,0.4) 3(-0.885,-0.4) 6(0.885,-0.4) 7(0.885,0.4)
  silkscreen extent -2.08,-1.86 0.8,1.86, body extent -0.8,-1.6 0.8,1.6, height 0.7
SMD3225_4P20MHZ20PF10PPM [mm]
  rect 1.4x1.2 smd: 1(-1.1,-0.85) 3(1.1,0.85) 4(-1.1,0.85)
  rect 1.4x1.2 smd mask+0.102: 2(1.1,-0.85)
  silkscreen extent -1.1,-2.05 -1,-1.95, body extent -1.68,-1.33 1.68,1.33, height 0.9
SOD-323 [mm]
  rrect20% 0.8x0.6 smd paste-0.025 mask+0.05: 1(-1.25,0) 2(1.25,0)
  silkscreen extent -0.9,-0.65 2.67,0.65, body extent -1.35,-0.62 1.35,0.63, height 1.1
SOT23(KT-46) [mm]
  rrect20% 0.65x1.1 smd: 1(-0.95,-1.15) 2(0.95,-1.15) 3(0,1.15)
  silkscreen extent -1.75,-0.75 1.75,0.75, body extent -1.5,-1.32 1.5,1.32, height 1.08
SOT-23-5 [mm]
  rrect20% 0.7x1.1 smd paste-0.025 mask+0.05: 1(-0.95,-1.2) 2(0,-1.2) 3(0.95,-1.2) 4(0.95,1.2) 5(-0.95,1.2)
  silkscreen extent -1.5,-0.8 1.5,0.8, body extent -1.5,-1.25 1.5,1.25, height 1.1
SOT-363 [mm]
  rrect20% 0.4x0.8 smd mask+0.1: 1(-0.65,-0.95) 2(0,-0.95) 3(0.65,-0.95) 4(0.65,0.95) 5(0,0.95) 6(-0.65,0.95)
  silkscreen extent -1.5,-1.2 1.2,0.7, body extent -1.1,-1.2 1.1,1.2, height 1.1
SW_1825910-6-4 [mm]
  rect 1.498x1.498 hole 0.99: 1(-3.25,2.25)
  round 1.498 hole 0.99: 1(3.25,2.25) 2(-3.25,-2.25) 2(3.25,-2.25)
  silkscreen extent -3,-2.99 3,2.99, body extent -3.9,-3 3.9,3, height 5.01

## Part data
BQ1: Package=0705, PartNumber=MQ-12.000-18, Company=Mercury
C2 C3 C4 C5 C6 C7 C8 C9 C10 C11 C12 C13 C14 C15 C16 C17 C18 C19 C20 C21 C22 C23: library part C
D1: library part LD3985M33R, Package=TSOT-23, PartNumber=LT1761ES5-2.5, Company="Linear Technology"
D2: library part stm32f103c8t6, Package=LQFP-48, Company=Xilinx, PurtNamber=XC6SLX25-2FGG484C
LD3: library part "7-сегментный индикатор", Package=TSOT-23, PartNumber=4042AS, Company="Linear Technology"
R3 R4 R25 R26 R27 R28: library part R330
R5 R20 R21 R22 R23 R24 R29 R30 R31 R32 R33 R34 R35 R36 R39 R40 R44 R45 R46 R47 R48 R49 R50 R51 R52 R53 R54 R55 R56 R57 R58 R59 R60 R61 R62 R63 R66 R67 R68: library part R
R6: library part R_3
R7 R8 R9 R10 R11 R12 R13 R14 R15 R16 R17 R18 R19 R37 R38 R41 R42 R43 R64 R65 R69 R70: library part R_1
S2 S3 S4 S5 S6: library part BTN, PartNumber=KLS7-TS6604-4.3-180-B, Company=KLS
VD9 VD13: Package=SOD-323, Company=NXP, PartNumber=BAS316
VT1 VT2: library part 2Т3129_1_1, PartNumber=2Т3129А9, Body=КТ-46А, Family=Транзистор, Name=2Т3129А9, NameCompany=Интеграл, TU="АО.336.448ТУ / 02"
VT3: library part T!9013, Package=SOT-23, PartNumber=BC847C, Company=NXP
X2 X3: library part 3113-112T
X4: library part KONT_POLE_120
X5: library part KONT_POLE_80
XP2: library part KONT_POLE_8_1, 1=GND, 2=VCC, 4=SDA, 5=RES, 6=DC, 7=BLK, 8=SCK
XP3: 1=1, 2=2, 3=3, 4=4
XS1: 1=VCC, 2=D-, 3=D+, 4=ID, 5=GND, 6=SHELL
XS2: 1=1, 2=2, 3=3, 4=4, 5=5, 6=6

## Via types
v1: diameter 0.8, hole 0.4, Top Layer to Bottom Layer, tented both sides, 29 vias
v2: diameter 3, hole 1.5, Top Layer to Bottom Layer, 4 vias

## Nets (pads, with @x,y where several pads share a name; then routed paths per layer and width w, separated by ;. In a path a pad name is that pad's centre, name@x,y a point inside that pad or via, vN(x,y) a via of type N, cw(c..) or ccw(c..) an arc to the next point about the centre after c; other vN are vias at no path point)
3V3: R5.2 R7.1 R8.1 R9.1 R10.1 R11.1 R12.1 R13.1 R14.1 R20.2 R21.2 R22.2 R23.2 R24.2 R49.1 VT1.1 VT1.4 VT2.1 VT2.4 X3.B10 X3.B11 X5.1 X5.76 X5.78 XP2.2 | length 5.4
  Top Layer w0.254: VT2.4 26.784,85.134 26.784,85.599 27.2,86.015 27.53,86.015 27.946,86.431 27.946,86.896 VT2.1 ; VT1.4 72.14,86.99 72.473,87.323 73.038,87.323 73.371,87.656 73.371,88.121 VT1.1
3V3_MCU: X2.B5 X2.B6
3V3_ST_LINK: C18.2 C19.2 D1.5 D2.1 D2.9 D2.24 D2.36 D2.48 R39.2 R41.1 R65.1 R70.1 VD11.1 VT3.3
5V: X5.3 X5.74
5V_USB: R37.1 XS1.1
AN_0: R29.2 X4.38
AN_1: R30.2 X4.35
AN_2: R31.2 X4.32
AN_3: R32.2 X4.29
BLK: XP2.7
BOOT0_MCU: X2.A9 X5.75
BOOT1_MCU: X2.A39 X5.77
BTN_C: C14.2 R19.1 S6.1 X4.47
BTN_D: C13.2 R18.1 S5.1 X4.53
BTN_L: C10.2 R15.1 S2.1 X4.44 | length 7.9
  Top Layer w0.254: S2.1@76.034,51.125 76.034,57.625 C10.2@76.034,59.034
BTN_R: C12.2 R17.1 S4.1 X4.50
BTN_U: C11.2 R16.1 S3.1 X4.41
CA: R27.1 X4.5
CB: R27.2 X4.8
CC: R27.3 X4.11
CD: R27.4 X4.14
CE: R28.1 X4.17
CF: R28.2 X4.20
CG: R28.3 X4.23
DC: XP2.6
DP: R28.4 X4.26
E5V: R42.1 VD9.1
G_TCK: X3.A25
G_TDI: X3.B25
G_TDO: X3.B24
G_TMS: X3.A24
GND: BQ1.2 BQ1.4 C2.1 C3.1 C4.1 C5.1 C6.1 C7.1 C8.1 C9.1 C10.1 C11.1 C12.1 C13.1 C14.1 C15.1 C16.1 C17.1 C18.1 C19.1 C20.2 C21.1 C22.1 C23.2 D1.2 D2.8 D2.20 D2.23 D2.35 D2.47 LD1.2 LD1.4 LD1.6 LD2.2 LD2.4 LD2.6 R6.1 R15.2 R16.2 R17.2 R18.2 R19.2 R33.2 R35.2 R36.1 R38.2 R43.2 R44.1 R52.1 R54.2 R64.2 SW1.3 SW2.3 SW3.3 SW4.3 SW5.3 SW6.3 SW7.3 SW8.3 VD1.2 VD2.2 VD3.2 VD4.2 VD5.2 VD6.2 VD7.2 VD8.2 VD12.2 X2.A5 X2.A6 X2.A7 X2.A14 X2.A19 X2.A20 X2.A23 X2.A25 X2.A27 X2.A29 X2.A30 X2.A41 X2.A44 X2.A47 X3.A10 X3.A11 X3.A14 X3.A17 X3.A19 X3.A22 X3.A27 X3.A28 X3.A29 X3.A30 X3.A32 X3.A33 X3.A37 X3.A38 X3.A39 X3.A42 X5.2 X5.4 X5.79 X5.80 XP2.1 XS1.5 XS2.3 | length 83
  Top Layer w0.254: SW8.3@47.95,22.15 48,22.1 v1(50.95,22.1) 53.8,22.1 53.85,22.15 SW8.3@53.875,22.125 ; v1@48,7.775 v1(48.02,7.795) C9.1 ; v1(48.6,25.275) 48.625,25.3 50.375,25.3 VD8.2 ; v1(58.1,7.85) 58.13,7.82 C7.1 ; SW7.3@58.55,22.15 58.65,22.05 64.35,22.05 SW7.3@64.45,22.15 ; v1@59.225,25.475 v1(59.25,25.5) VD7.2 ; v1(68.9,7.95) 68.903,7.947 C8.1 ; SW6.3@69.05,22.15 SW6.3@74.95,22.15 ; v1(70.125,25.45) 70.137,25.462 71.637,25.462 VD6.2 ; v1(73.225,59.45) 74.625,59.45 C10.1 ; v1(79.25,7.95) 79.278,7.922 C6.1 ; SW5.3@79.55,22.15 SW5.3@85.45,22.15 ; v1(80.375,25.475) VD5.2 ; C14.1@82.039,58.563 C14.1 81.983,58.675 v1(83.675,58.675) ; C13.1 89.075,45.198 v1(89.075,43.825) ; v1@89.7,7.675 89.795,7.77 C5.1 ; SW4.3@89.95,22.15 SW4.3@95.85,22.15 ; v1(90.275,25.375) 90.325,25.325 VD4.2 ; v1(92.6,59.5) 94.666,59.5 C12.1 ; R6.1 96.62,86.75 v1(98.12,86.75) ; SW3.3@100.55,22.15 SW3.3@106.45,22.15 ; v1@100.675,7.925 100.715,7.965 C3.1 ; v1(101.425,25.25) VD3.2 ; v1@110.5,7.95 110.502,7.952 C4.1 ; SW2.3@111.05,22.15 SW2.3@116.95,22.15 ; v1(111.875,25.3) 111.9,25.275 113.275,25.275 VD2.2 ; v1@120.75,8.125 120.847,8.028 C2.1 ; SW1.3@121.5,22.15 SW1.3@127.4,22.15 ; v1(122.175,25.1) 122.188,25.112 123.588,25.112 VD1.2
  other v1: 89.747,7.722 100.725,8 110.65,8.025 120.798,8.077 61.575,22.05 72,22.15 82.5,22.15 92.9,22.15 103.5,22.15 114,22.15 124.575,22.15
  other v2: 156.925,136.65
JTCK_MCU: R60.1 X2.B19
JTDI_MCU: X2.A18
JTDO: D2.31
JTDO_MCU: R59.2 X2.A12
JTMS_MCU: R68.1 X2.B20
LDB_0: R26.1 X4.89
LDB_1: R25.1 X4.80
LDG_0: R26.2 X4.92
LDG_1: R25.2 X4.83
LDR_0: R26.3 X4.95
LDR_1: R25.3 X4.86
LEDB_0: R3.1 X4.56
LEDB_1: R3.2 X4.59
LEDB_2: R3.3 X4.62
LEDB_3: R3.4 X4.65
LEDB_4: R4.1 X4.68
LEDB_5: R4.2 X4.71
LEDB_6: R4.3 X4.74
LEDB_7: R4.4 X4.77
MCO_MCU: R46.1 X2.B1 X5.69
NetBQ1_1: BQ1.1 C22.2 D2.5
NetBQ1_3: BQ1.3 C20.1 D2.6
NetC15_2: C15.2 C16.2 D1.1 D1.3 VD9.2
NetC17_2: C17.2 D1.4
NetC21_2: C21.2 D2.7 R39.1
NetC23_1: C23.1 R46.2 R50.1
NetD2_2: D2.2 R44.2
NetD2_3: D2.3 R36.2
NetD2_10: D2.10 R49.2 R52.2 R53.2
NetD2_18: D2.18 R58.2 R67.1
NetD2_21: D2.21 R70.2
NetD2_29: D2.29 R50.2
NetD2_30: D2.30 R47.2 R48.2
NetD2_32: D2.32 R45.2
NetD2_33: D2.33 R51.2
NetD2_39: D2.39 R42.2 R43.1
NetD2_44: D2.44 R35.1
NetJP1_1: R41.2
NetLD1_1: LD1.1 R25.8
NetLD1_3: LD1.3 R25.7
NetLD1_5: LD1.5 R25.6
NetLD2_1: LD2.1 R26.8
NetLD2_3: LD2.3 R26.7
NetLD2_5: LD2.5 R26.6
NetLD3_1: LD3.1 R28.8
NetLD3_2: LD3.2 R27.5
NetLD3_3: LD3.3 R28.5
NetLD3_4: LD3.4 R27.6
NetLD3_5: LD3.5 R28.6
NetLD3_6: LD3.6 VT1.6
NetLD3_7: LD3.7 R27.7
NetLD3_8: LD3.8 VT1.3
NetLD3_9: LD3.9 VT2.6
NetLD3_10: LD3.10 R28.7
NetLD3_11: LD3.11 R27.8
NetLD3_12: LD3.12 VT2.3
NetR3_5: R3.5 VD4.1
NetR3_6: R3.6 VD3.1 | length 3.9
  Top Layer w0.254: VD3.1@104.475,25.2 104.475,26.325 106.46,28.31
NetR3_7: R3.7 VD2.1 | length 6.4
  Top Layer w0.254: 110.05,27.375 110.775,26.65 114.45,26.65 114.85,26.25 VD2.1@114.85,25.15
NetR3_8: R3.8 VD1.1
NetR4_5: R4.5 VD8.1
NetR4_6: R4.6 VD7.1 | length 3.7
  Top Layer w0.254: VD7.1 62.25,26.65 64.084,28.484
NetR4_7: R4.7 VD6.1 | length 3.7
  Top Layer w0.254: 71.391,28.484 73.15,26.725 VD6.1
NetR4_8: R4.8 VD5.1
NetR20_1: R20.1 S2.2
NetR21_1: R21.1 S3.2
NetR22_1: R22.1 S4.2
NetR23_1: R23.1 S5.2
NetR24_1: R24.1 S6.2
NetR29_1: R29.1 VT1.2
NetR30_1: R30.1 VT1.5 | length 2.3
  Top Layer w0.254: R30.1 72.79,84.056 VT1.5
NetR31_1: R31.1 VT2.2
NetR32_1: R32.1 VT2.5 | length 4.3
  Top Layer w0.254: R32.1 27.066,81.69 27.263,81.887 27.263,81.911 27.365,82.013 VT2.5
NetR33_1: R33.1 XS1.4
NetR34_1: R34.1 R51.1 XS1.3
NetR34_2: R34.2 VT3.1
NetR37_2: R37.2 R38.1 R40.1 VT3.2
NetR45_1: R45.1 XS1.2
NetR47_1: R47.1 VD11.2
NetR48_1: R48.1 VD12.1
NetR53_1: R53.1 VD13.2
NetR54_1: R54.1 VD13.1 XS2.1
NetR55_1: R55.1 XS2.2
NetR56_1: R56.1 XS2.4
NetR57_1: R57.1 XS2.6
NetR58_1: R58.1 XS2.5
NetR60_2: R60.2 R62.1 XP3.2
NetR61_1: R61.1 R65.2 XP3.1
NetR63_2: R63.2 R64.1 XP3.3
NetR66_2: R66.2 R68.2 XP3.4
nJTRST_MCU: X2.A11
nRST_MCU: R67.2 X2.A49
PA0: X2.B46 X4.97
PA1: X2.A46 X4.4
PA2: X2.A45 X4.7
PA3: X2.B45 X4.100
PA4: X2.B44 X4.103
PA5: X2.A43 X4.10
PA6: X2.B43 X4.106
PA7: X2.A42 X4.13
PA8: X2.B23 X5.35
PA9: X2.A22 X4.52
PA10: X2.A21 X4.55
PA11: X2.B22 X5.37
PA12: X2.B21 X5.39
PB0: X2.A40 X4.16
PB1: X2.B40 X4.115
PB5: X2.B11 X5.55
PB6: X2.A10 X4.70
PB7: X2.B10 X5.57
PB8: X2.A8 X4.73
PB9: X2.B9 X5.59
PB10: X2.B34 X5.13
PB11: X2.A34 X4.31
PB12: X2.A33 X4.34
PB13: X2.B33 X5.15
PB14: X2.B32 X5.17
PB15: X2.A32 X4.37
PC0: X2.B49 X4.88
PC1: X2.B48 X4.91
PC2: X2.A48 X4.1
PC3: X2.B47 X4.93
PC4: X2.B42 X4.109
PC5: X2.B41 X4.112
PC6: X2.B26 X5.29
PC7: X2.B25 X5.31
PC8: X2.A24 X4.49
PC9: X2.B24 X5.33
PC10: X2.B18 X5.41
PC11: X2.A17 X4.58
PC12: X2.B17 X5.43
PC13: X2.A1 X4.85
PD0: X2.A16 X4.61
PD1: X2.B16 X5.45
PD2: X2.B15 X5.47
PD3: X2.A15 X4.64
PD4: X2.B14 X5.49
PD5: X2.B13 X5.51
PD6: X2.A13 X4.67
PD7: X2.B12 X5.53
PD8: X2.B31 X5.19
PD9: X2.A31 X4.40
PD10: X2.B30 X5.21
PD11: X2.B29 X5.23
PD12: X2.A28 X4.43
PD13: X2.B28 X5.25
PD14: X2.B27 X5.27
PD15: X2.A26 X4.46
PE0: X2.B8 X5.61
PE1: X2.B7 X5.63
PE2: X2.A4 X4.76
PE3: X2.A3 X4.79
PE4: X2.B3 X5.65
PE5: X2.A2 X4.82
PE6: X2.B2 X5.67
PE7: X2.A38 X4.19
PE8: X2.B39 X4.118
PE9: X2.B38 X5.5
PE10: X2.A37 X4.22
PE11: X2.A36 X4.25
PE12: X2.B37 X5.7
PE13: X2.B36 X5.9
PE14: X2.B35 X5.11
PE15: X2.A35 X4.28
PHOTO_R: R5.1 R6.2 X4.2
PIN_1: X3.B37 X5.30
PIN_2: X3.B36 X5.32
PIN_3: X3.A36 X4.30
PIN_4: X3.B35 X5.34
PIN_5: X3.A35
PIN_6: X3.A34 X4.36
PIN_7: X3.B34 X5.36
PIN_8: X3.B33 X5.38
PIN_12: X3.B32 X5.40
PIN_14: X3.B31 X5.42
PIN_15: X3.A31 X4.39
PIN_16: X3.B30 X5.44
PIN_17: X3.B29 X5.46
PIN_18: X3.B28 X5.48
PIN_19: X3.B27 X5.50
PIN_20: X3.B26 X5.52
PIN_21: X3.A26 X4.42
PIN_26: X3.A23 X4.45
PIN_27: X3.B23 X5.54
PIN_28: X3.B22 X5.56
PIN_29: X3.B21 X5.58
PIN_30: X3.A21 X4.48
PIN_33: X3.A20 X4.51
PIN_34: X3.B20 X5.60
PIN_35: X3.B19 X5.62
PIN_36: X3.A18 X4.54
PIN_37: X3.B18 X5.64
PIN_38: X3.B17 X5.66
PIN_39: X3.A16 X4.57
PIN_40: X3.B16 X5.68
PIN_41: X3.A15 X4.60
PIN_42: X3.B15 X5.70
PIN_43: X3.B14 X5.71
PIN_47: X3.B13 X5.72
PIN_48: X3.A13 X4.63
PIN_49: X5.73
PIN_50: X3.A12 X4.66
PIN_51: X3.A9 X4.69
PIN_52: X3.B9 X4.120
PIN_53: X3.B8 X4.117
PIN_54: X3.A8 X4.72
PIN_55: X3.A7 X4.75
PIN_56: X3.B7 X4.114
PIN_57: X3.B6 X4.111
PIN_58: X3.A6 X4.78
PIN_66: X3.B5 X4.108
PIN_67: X3.A5 X4.81
PIN_68: X3.A4 X4.84
PIN_69: X3.B4 X4.105
PIN_70: X3.B3 X4.102
PIN_71: X3.A3 X4.87
PIN_72: X3.A2 X4.90
PIN_73: X3.B2 X4.99
PIN_74: X3.B1 X4.96
PIN_75: X3.A1 X4.94
PIN_76: X3.A49 X4.3
PIN_77: X3.B49 X5.6
PIN_78: X3.B48 X5.8
PIN_81: X3.A48 X4.6
PIN_82: X3.B47 X5.10
PIN_83: X3.A47 X4.9
PIN_84: X3.B46 X5.12
PIN_85: X3.A46 X4.12
PIN_86: X3.A45 X4.15
PIN_87: X3.B45 X5.14
PIN_88: X3.B44 X5.16
PIN_89: X3.A44 X4.18
PIN_90: X3.A43 X4.21
PIN_91: X3.B43 X5.18
PIN_92: X3.B42 X5.20
PIN_95: X3.A41 X4.24
PIN_96: X3.B41 X5.22
PIN_97: X3.A40 X4.27
PIN_98: X3.B40 X5.24
PIN_99: X3.B39 X5.26
PIN_100: X3.B38 X5.28
PWR_ENn: D2.28
RES: XP2.5
SCK: XP2.3
SDA: XP2.4
STM_JTCK: D2.37 R62.2
STM_JTMS: D2.34 R66.1
SW_0: C2.2 R7.2 SW1.2 X4.119
SW_1: C4.2 R9.2 SW2.2 X4.116
SW_2: C3.2 R8.2 SW3.2 X4.113
SW_3: C5.2 R10.2 SW4.2 X4.110
SW_4: C6.2 R11.2 SW5.2 X4.107
SW_5: C8.2 R13.2 SW6.2 X4.104
SW_6: C7.2 R12.2 SW7.2 X4.101
SW_7: C9.2 R14.2 SW8.2 X4.98
T_JTCK: D2.15 D2.26 R55.2 R61.2
T_JTDI: D2.17
T_JTDO: D2.16
T_JTMS: D2.25 R56.2 R63.1 R69.1
T_SWDIO_IN: D2.27 R69.2
T_SWO: R57.2 R59.1
USB_RENUMn: D2.38 R40.2
VBAT_MCU: X2.B4
pads on no net: D2.4 D2.11 D2.12 D2.13 D2.14 D2.19 D2.22 D2.40 D2.41 D2.42 D2.43 D2.45 D2.46 R25.4 R25.5 R26.4 R26.5 SW1.1 SW2.1 SW3.1 SW4.1 SW5.1 SW6.1 SW7.1 SW8.1 X2.4 X2.5 X2.50 X2.51 X3.4 X3.5 X3.50 X3.51 X3.B12 XS1.S1 XS1.S2 XS1.S3 XS1.S4 XS1.S5 XS1.S6
copper on no net:
  other v2: 157.3,2.475 3,2.7 3.65,135.65

## Silkscreen, mask and mechanical layers (free items; w line width, h text height)
Top Overlay:
  lines w0.127: 22.873,84.674 22.873,87.57 24.498,87.57 24.498,84.674 22.873,84.674 ; 24.186,80.864 27.082,80.864 27.082,82.499 24.186,82.499 24.186,80.864 ; 48.857,4.976 51.753,4.976 51.753,6.601 48.857,6.601 48.857,4.976 ; 48.857,6.982 51.753,6.982 51.753,8.608 48.857,8.608 48.857,6.982 ; 59.094,4.976 61.989,4.976 61.989,6.601 59.094,6.601 59.094,4.976 ; 59.119,7.008 62.015,7.008 62.015,8.633 59.119,8.633 59.119,7.008 ; 62.14,49.644 65.036,49.644 65.036,51.27 62.14,51.27 62.14,49.644 ; 62.14,51.626 65.036,51.626 65.036,53.251 62.14,53.251 62.14,51.626 ; 62.14,53.607 65.036,53.607 65.036,55.232 62.14,55.232 62.14,53.607 ; 62.14,55.613 65.036,55.613 65.036,57.239 62.14,57.239 62.14,55.613 ; 62.166,57.696 65.061,57.696 65.061,59.322 62.166,59.322 62.166,57.696 ; 69.863,5.153 72.759,5.153 72.759,6.779 69.863,6.779 69.863,5.153 ; 69.863,7.109 72.759,7.109 72.759,8.735 69.863,8.735 69.863,7.109 ; 72.015,83.274 74.84,83.274 74.84,84.799 72.015,84.799 72.015,83.274 ; 75.346,85.675 75.346,88.571 76.972,88.571 76.972,85.675 75.346,85.675 ; 80.201,5.103 83.097,5.103 83.097,6.728 80.201,6.728 80.201,5.103 ; 80.226,7.084 83.122,7.084 83.122,8.709 80.226,8.709 80.226,7.084 ; 90.615,4.823 93.511,4.823 93.511,6.449 90.615,6.449 90.615,4.823 ; 90.666,6.957 93.561,6.957 93.561,8.582 90.666,8.582 90.666,6.957 ; 93.564,81.52 96.459,81.52 96.459,83.145 93.564,83.145 93.564,81.52 ; 101.689,5.026 104.585,5.026 104.585,6.652 101.689,6.652 101.689,5.026 ; 101.715,7.135 104.61,7.135 104.61,8.76 101.715,8.76 101.715,7.135 ; 102.057,56.665 104.953,56.665 104.953,58.291 102.057,58.291 102.057,56.665 ; 102.057,58.977 104.953,58.977 104.953,60.602 102.057,60.602 102.057,58.977 ; 102.082,49.503 104.978,49.503 104.978,51.128 102.082,51.128 102.082,49.503 ; 102.082,51.916 104.978,51.916 104.978,53.541 102.082,53.541 102.082,51.916 ; 102.082,54.329 104.978,54.329 104.978,55.954 102.082,55.954 102.082,54.329 ; 111.569,5.057 114.465,5.057 114.465,6.682 111.569,6.682 111.569,5.057 ; 111.595,7.165 114.49,7.165 114.49,8.79 111.595,8.79 111.595,7.165 ; 122.009,5.082 124.904,5.082 124.904,6.708 122.009,6.708 122.009,5.082 ; 122.009,7.19 124.904,7.19 124.904,8.816 122.009,8.816 122.009,7.19
  lines w0.254: 18.805,32.048 18.805,71.048 46.405,71.048 46.405,32.048 18.805,32.048 ; 30.065,83.19 70.365,83.19 70.365,99.19 30.065,99.19 30.065,83.19 ; 114.58,80.875 125.58,80.875 125.58,91.875 114.58,91.875 114.58,80.875
  text "PROG" at 117.134,82.629 h1.52

## Text inside footprints (layer, text, board x,y; h text height)
X2: Top Overlay "B" at 74.296,120.121 h1 r180; Top Overlay "A" at 74.296,118.121 h1 r180
X3: Top Overlay "B" at 143.221,120.296 h1 r180; Top Overlay "A" at 143.221,118.296 h1 r180